# Altium PCB PC110-itx.PcbDoc (part 16 of 16)
Units mm, origin at the board's own origin, x right, y up, seen from the top; angles counter-clockwise.
Board outline 170 x 170 mm, 16 copper layers (FC1, FC2, FC3, FC4, IP1, IC1, IC2, IP2, IP3, IC3, IC4, IP4, BC4, BC3, BC2, BC1), stack 3.903 mm thick; 935 components, 1357 nets, 4698 pads, 3240 vias.
Unrouted connection lines stored in the file: 552.
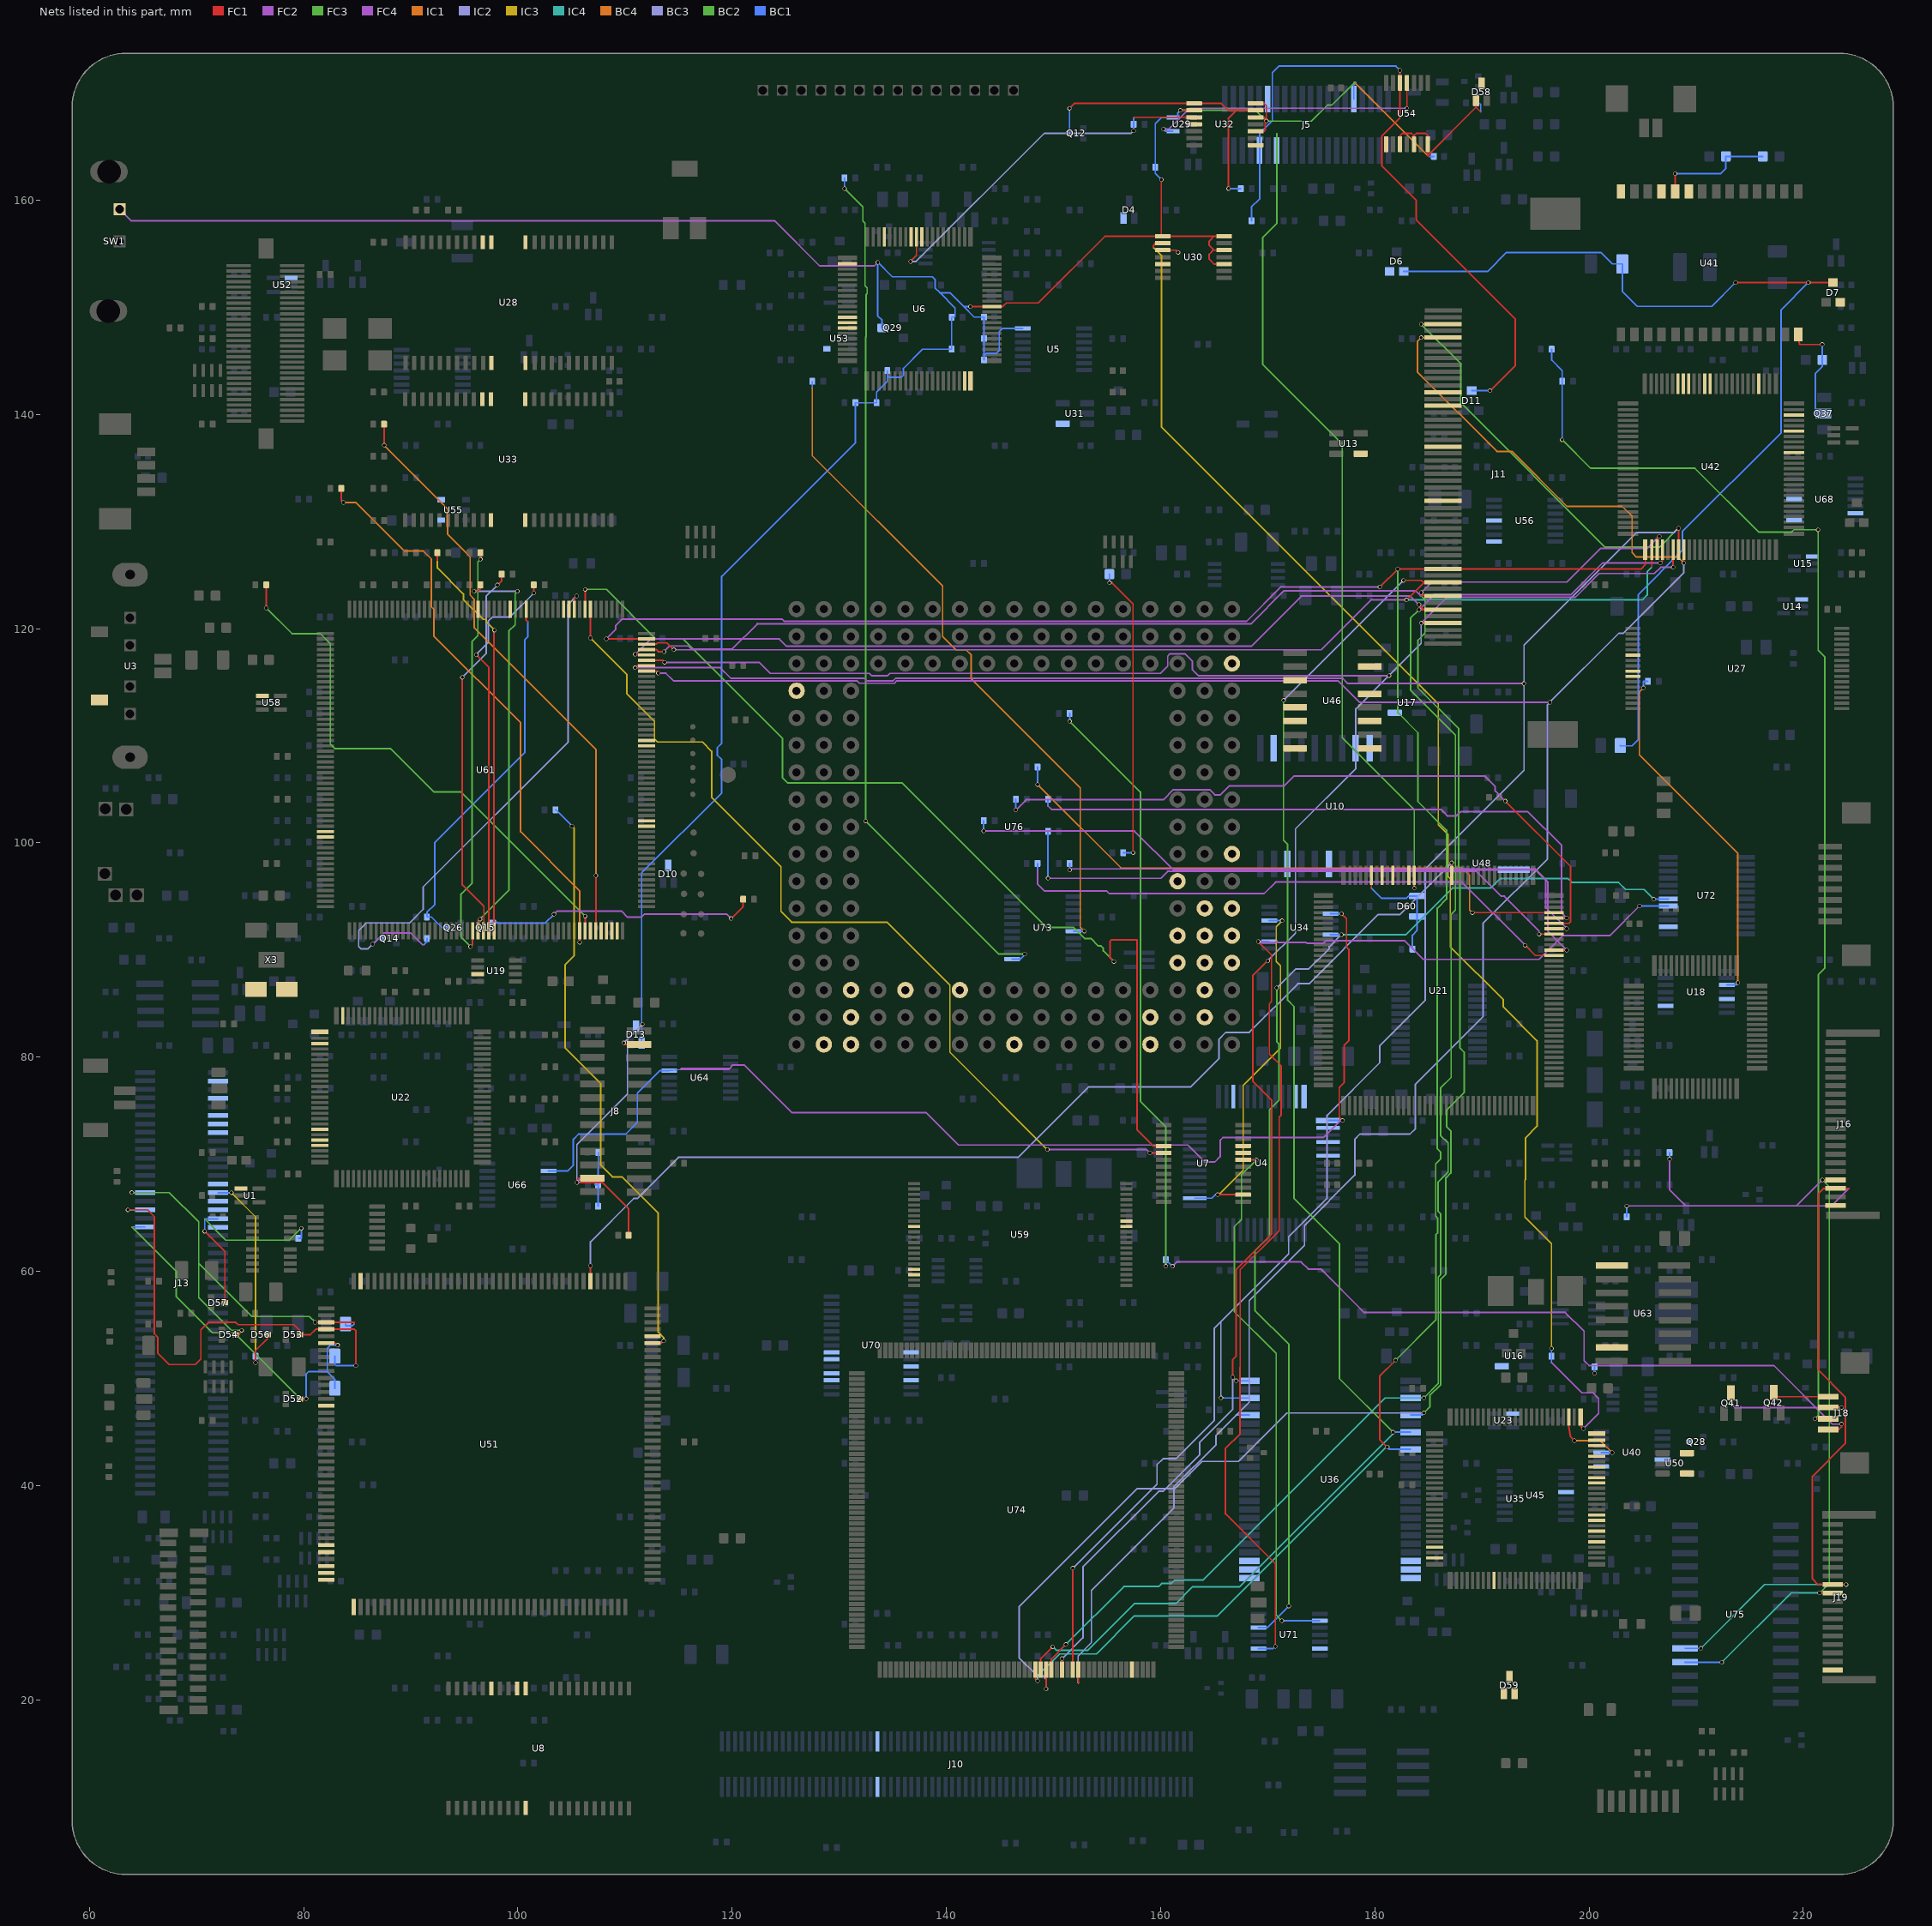
[diagram p29: the nets of this part, all layers, seen from the top]

## Via types
v1: diameter 0.4, hole 0.3, FC1 to BC1, 3240 vias

## Nets (pads, with @x,y where several pads share a name; then routed paths per layer and width w, separated by ;. In a path a pad name is that pad's centre, name@x,y a point inside that pad or via, vN(x,y) a via of type N, cw(c..) or ccw(c..) an arc to the next point about the centre after c; other vN are vias at no path point) (continued)
SD9: J11.46 U36.20 U42.8 U61.45 U74.142 | length 260.1
  FC1 w0.15: U61.45@112.028,116.057 112.899,116.057 v1(113.106,115.849) ; 152.308,21.574 U74.142@152.308,22.819 ; v1(184.328,147.172) J11.46@186.358,147.172 ; v1(208.852,126.145) U42.8@208.852,127.375
  FC2 w0.15: v1(113.106,115.849) 113.804,115.849 114.515,115.138 131.663,115.138 131.891,114.91 135.157,114.91 135.385,115.138 176.558,115.138 178.565,113.132 v1(196.342,113.132)
  BC4 w0.15: v1(184.328,147.172) 183.972,146.817 183.972,143.967 191.389,136.55 192.811,136.55 197.942,131.42 203.098,131.42 204.013,130.505 204.013,127.102 204.419,126.695 208.302,126.695 v1(208.852,126.145)
  BC3 w0.15: 152.308,21.574 152.298,21.565 152.298,24.105 153.543,25.349 153.543,30.201 161.239,37.897 161.239,39.891 165.176,43.828 165.176,44.704 168.275,47.803 168.275,57.277 173.438,62.44 173.438,64.294 178.13,68.986 178.13,72.339 178.613,72.822 183.286,72.822 183.794,73.33 183.794,77.47 190.094,83.769 190.094,92.492 196.113,98.511 196.113,112.902 v1(196.342,113.132) 202.794,119.583 203.2,119.583 208.852,125.235 v1(208.852,126.145)
  BC1 w0.15: 167.062,46.59 U36.20@168.29,46.59
SD10: J11.48 U36.22 U42.7 U61.46 U74.141 | length 267
  FC1 w0.15: v1(110.951,116.357) 111.15,116.557 U61.46@112.028,116.557 ; U74.141@151.808,22.819 v1(151.808,32.301) ; v1(184.328,148.423) J11.48@186.358,148.423 ; U42.7@208.352,127.375 v1(208.352,129.388)
  FC2 w0.15: v1(110.951,116.357) 118.897,116.357 119.884,115.37 132.357,115.37 132.587,115.14 135.036,115.14 135.266,115.37 177.004,115.37 177.495,114.879 v1(193.924,114.879)
  BC2 w0.15: v1(184.328,148.423) 188.036,144.714 188.036,141.072 201.498,127.61 206.574,127.61 v1(208.352,129.388)
  BC3 w0.15: v1(151.808,32.301) 159.665,40.158 159.665,41.961 160.223,42.519 161.442,42.519 165.005,46.082 165.005,54.667 165.633,55.296 ; v1(165.633,48.19) 165.633,55.296 ; v1(208.352,129.388) 207.946,128.981 204.445,128.981 193.924,118.46 v1(193.924,114.879) 193.924,106.776 184.709,97.561 184.709,85.319 180.471,81.081 180.471,79.506 175.539,74.574 175.539,66.827 171.958,63.246 171.958,61.62 165.633,55.296
  BC1 w0.15: v1(165.633,48.19) U36.22@168.29,48.19
SD11: J11.4 U36.24 U42.6 U61.47 U74.139 | length 217
  FC1 w0.15: U61.47@112.028,117.057 113.513,117.057 v1(113.704,116.865) ; U74.139@150.808,22.819 v1(150.808,23.851) ; v1(167.06,49.79) v1(166.726,50.124) 166.726,51.765 167.06,52.098 167.06,60.177 170.365,63.481 170.365,75.996 168.605,77.755 168.605,87.605 v1(170.002,89.002) ; v1(184.327,120.522) J11.4@186.358,120.522 ; v1(207.852,125.733) U42.6@207.852,127.375
  FC2 w0.15: v1(113.704,116.865) 122.53,116.865 123.565,115.83 132.817,115.83 133.047,115.6 134.495,115.6 134.725,115.83 159.969,115.83 160.665,116.527 160.665,117.45 160.88,117.665 162.285,117.665 162.957,116.992 162.957,116.189 163.525,115.621 v1(181.331,115.621) ; v1(184.327,120.522) 186.739,122.934 198.728,122.934 200.947,125.154 206.11,125.154 206.69,125.733 v1(207.852,125.733)
  BC3 w0.15: v1(150.808,23.851) 152.756,25.798 152.756,32.412 159.815,39.472 160.223,39.472 163.654,42.903 163.654,44.045 166.726,47.118 v1(166.726,50.124) ; v1(170.002,89.002) 172.593,91.592 172.593,101.321 178.232,106.959 178.232,112.522 v1(181.331,115.621) 184.327,118.618 v1(184.327,120.522)
  BC1 w0.15: v1(167.06,49.79) U36.24@168.29,49.79
SD12: J11.6 U36.27 U42.4 U61.48 U74.137 | length 230.7
  FC1 w0.15: v1(110.947,117.602) 110.992,117.557 U61.48@112.028,117.557 ; U74.137@149.808,22.819 149.808,23.824 v1(151.155,25.171) ; v1@184.124,121.772 v1(184.129,121.772) 184.602,121.772 ; v1(184.125,122.25) 184.602,121.772 ; J11.6@186.358,121.772 184.602,121.772 ; v1(206.64,126.136) 206.852,126.348 U42.4@206.852,127.375
  FC2 w0.15: v1@184.124,121.772 185.516,123.164 198.295,123.164 201.267,126.136 v1(206.64,126.136)
  FC3 w0.15: v1(184.129,121.772) 183.337,120.98 183.337,114.275 187.528,110.084 187.528,93.726 187.122,93.32 187.122,78.105 186.131,77.115 186.131,72.695 186.842,71.984 186.842,69.282 185.916,68.355 185.916,65.595 186.13,65.38 186.13,59.668 185.925,59.462 185.925,49.533 v1(184.582,48.19)
  IC4 w0.15: v1(151.155,25.171) 156.566,30.582 159.816,30.582 160.095,30.861 160.985,30.861 161.332,31.208 163.971,31.208 180.953,48.19 v1(184.582,48.19)
  FC4 w0.15: v1(110.947,117.602) 112.395,119.05 124.409,119.05 125.095,118.364 168.461,118.364 173.137,123.04 183.335,123.04 v1(184.125,122.25)
  BC1 w0.15: U36.27@183.34,48.19 v1(184.582,48.19)
SD13: J11.8 U36.29 U42.3 U61.49 U74.136 | length 241.2
  FC1 w0.15: U61.49@112.028,118.057 112.903,118.057 113.104,117.856 v1(113.64,117.856) ; v1(149.308,21.033) U74.136@149.308,22.819 ; v1(184.328,123.368) 184.328,123.342 184.598,123.072 ; 184.337,123.072 184.598,123.072 ; J11.8@186.358,123.072 184.598,123.072 ; U42.3@206.352,127.375 206.352,128.422 v1(206.555,128.626)
  FC2 w0.15: v1(113.64,117.856) 114.173,118.389 115.926,118.389 116.205,118.11 120.015,118.11 122.355,120.45 ; v1(184.328,123.368) 185.318,124.358 197.942,124.358 201.066,127.483 205.412,127.483 v1(206.555,128.626)
  FC3 w0.15: 184.328,123.063 184.683,122.707 184.683,119.583 184.023,118.923 184.023,114.478 187.833,110.668 187.833,97.79 187.935,97.688 187.935,80.874 188.341,80.467 188.341,76.683 186.689,75.031 186.689,73.532 187.096,73.125 187.096,69.183 186.639,68.725 186.639,59.766 186.155,59.282 186.155,49.422 185.141,48.407 185.141,47.346 v1(184.582,46.787)
  IC2 w0.15: v1(149.308,21.033) 149.308,21.946 148.902,22.352 148.363,22.352 146.787,23.927 146.787,28.703 157.792,39.708 161.297,39.708 163.855,42.266 167.261,42.266 171.783,46.787 v1(184.582,46.787)
  FC4 w0.15: 122.355,120.45 168.431,120.45 171.526,123.546 183.794,123.546 184.15,123.19 184.277,123.063 ; 184.328,123.063 184.277,123.063 ; 184.337,123.072 184.277,123.063
  BC1 w0.15: U36.29@183.34,46.59 184.385,46.59 v1(184.582,46.787)
SD14: J11.10 U36.31 U42.2 U61.50 U74.135 | length 239.4
  FC1 w0.15: U61.50@112.028,118.557 112.922,118.557 113.034,118.669 113.929,118.669 v1(114.564,118.034) ; U74.135@148.808,22.819 148.808,23.84 v1(149.936,24.968) ; v1(182.677,124.511) 184.317,124.511 184.597,124.322 ; v1(182.956,122.682) 184.597,124.322 ; J11.10@186.358,124.322 184.597,124.322 ; 205.852,125.74 U42.2@205.852,127.375
  FC3 w0.15: v1(171.475,113.309) 171.475,100.254 171.856,99.874 171.856,85.32 172.466,84.71 172.466,66.802 176.688,62.58 176.688,50.005 v1(181.704,44.99) v1@181.704,44.87
  IC4 w0.15: v1(149.936,24.968) 150.266,24.639 153.214,24.639 157.556,28.981 161.414,28.981 162.988,30.556 167.39,30.556 v1@181.704,44.87 ; v1(182.956,122.682) 204.978,122.682 205.435,123.139 205.435,125.324 205.852,125.74
  FC4 w0.15: v1(114.564,118.034) 174.981,118.034 179.629,122.682 v1(182.956,122.682)
  BC3 w0.15: v1(171.475,113.309) v1(182.677,124.511)
  BC1 w0.15: v1(181.704,44.99) U36.31@183.34,44.99
SD15: J11.12 U36.33 U42.1 U61.51 U74.134 | length 237.9
  FC1 w0.15: v1(108.255,119.057) U61.51@112.028,119.057 ; U74.134@148.308,22.819 148.308,21.974 v1(148.514,21.768) ; v1(180.472,123.901) v1(182.143,125.573) J11.12@186.358,125.573 204.841,125.573 205.252,125.984 U42.1@205.252,127.375 ; v1@181.058,43.593 v1(181.165,43.593) 180.447,44.311 180.447,50.221 v1(181.94,51.714)
  FC3 w0.15: v1(181.94,51.714) 185.695,55.469 185.695,63.419 185.877,63.602 185.877,64.959 185.686,65.15 185.686,70.053 186.131,70.499 186.131,71.145 185.826,71.45 185.826,93.904 186.69,94.767 186.69,101.194 184.023,103.861 184.023,110.287 182.143,112.166 v1(182.143,125.573)
  IC4 w0.15: v1(148.514,21.768) 148.514,22.242 150.563,24.291 154.008,24.291 157.556,27.838 165.303,27.838 v1@181.058,43.593
  FC4 w0.15: v1(108.255,119.057) 109.144,119.946 109.144,120.294 109.728,120.879 124.677,120.879 124.875,120.68 168.011,120.68 171.232,123.901 v1(180.472,123.901)
  BC1 w0.15: v1(181.165,43.593) 181.368,43.39 U36.33@183.34,43.39
Touch_X+: J18.2 R207.2 R386.1 | length 121.3
  FC1 w0.15: v1(221.082,46.253) 221.083,46.255 J18.2@222.33,46.255
  FC3 w0.15: v1(221.082,46.253) 221.412,46.584 221.412,87.732 222.021,88.341 222.021,117.348 221.386,117.983 v1(221.386,129.235)
  BC2 w0.15: v1(197.49,137.638) 200.152,134.976 209.88,134.976 215.824,129.032 218.923,129.032 219.126,129.235 v1(221.386,129.235)
  BC1 w0.15: R386.1@196.51,146.09 196.51,145.074 197.49,144.094 R207.2@197.49,143.09 v1(197.49,137.638)
Touch_X-: J18.3 Q41.2 | length 12.7
  FC1 w0.15: v1(213.25,47.65) Q41.2@213.25,48.65 ; J18.3@222.33,47.305 223.561,47.305 v1(223.571,47.295)
  FC2 w0.15: v1(213.25,47.65) 213.606,47.295 v1(223.571,47.295)
Touch_Y+: J18.1 R208.2 R388.1 | length 128.9
  FC1 w0.15: J18.1@222.33,45.255 223.317,45.255 223.571,45.509 v1(223.571,45.745)
  FC3 w0.15: v1(151.51,111.355) 158.115,104.75 158.115,75.87 160.49,73.495 v1(160.49,60.477)
  FC4 w0.15: v1(161.115,60.477) 161.522,60.884 173.126,60.884 173.787,60.223 174.955,60.223 179.019,56.159 197.79,56.159 199.536,54.413 199.536,51.67 200,51.206 217.246,51.206 222.707,45.745 v1(223.571,45.745)
  BC1 w0.15: v1(151.51,111.355) R388.1@151.51,112.09 ; v1(160.49,60.477) R208.2@160.49,61.09 160.503,61.09 v1(161.115,60.477)
Touch_Y-: J18.4 Q42.2 | length 5.3
  FC1 w0.15: Q42.2@217.24,48.7 217.635,48.305 J18.4@222.33,48.305
TRKPD_Lclick: J16.4 J19.10 R206.1 U75.4 | length 76.3
  FC1 w0.15: v1(221.528,29.985) J19.10@222.758,29.985 ; v1(221.782,68.543) J16.4@223.012,68.543
  FC2 w0.15: v1(207.51,70.485) 207.51,67.623 209.017,66.116 219.355,66.116 v1(221.782,68.543)
  FC3 w0.15: v1(221.528,29.985) 222.428,30.885 222.428,67.897 v1(221.782,68.543)
  IC4 w0.15: v1(212.384,23.51) 218.859,29.985 v1(221.528,29.985)
  BC1 w0.15: v1(207.51,70.485) R206.1@207.51,71.09 ; U75.4@208.955,23.51 v1(212.384,23.51)
TRKPD_Rclick: J16.3 J19.11 R196.1 U75.5 | length 84.6
  FC1 w0.15: v1(223.99,30.772) 223.977,30.785 J19.11@222.758,30.785 221.361,30.785 220.853,31.293 220.853,40.869 223.926,43.942 223.926,48.26 221.412,50.775 221.412,67.26 221.894,67.743 J16.3@223.012,67.743 224.255,67.743
  IC4 w0.15: v1(210.439,24.81) 216.401,30.772 v1(223.99,30.772)
  FC4 w0.15: v1(203.51,66.116) 222.631,66.116 224.257,67.742 224.255,67.743
  BC1 w0.15: R196.1@203.51,65.09 v1(203.51,66.116) ; U75.5@208.955,24.81 v1(210.439,24.81)
U8_1A3_KB_TP139: R283.2 U73.6 | length 63.4
  IC1 w0.15: 127.49,142.476 127.483,142.469 127.483,136.144 139.649,123.977 139.649,119.278 140.894,118.034 141.834,118.034 142.316,117.551 142.316,115.316 152.502,105.131 152.502,92.151 v1(152.883,91.77)
  BC1 w0.15: 127.49,142.476 R283.2@127.49,143.09 ; U73.6@151.862,91.765 152.877,91.765 v1(152.883,91.77)
U8_2A1_KB_RXD: R38.2 U73.11 | length 82.4
  FC3 w0.15: v1(130.49,161.087) 132.207,159.37 132.207,158.064 132.41,157.861 132.41,152.018 132.613,151.816 132.613,151.308 132.511,151.207 132.511,147.269 132.461,147.219 v1(132.461,102.057)
  BC2 w0.15: v1(132.461,102.057) 144.893,89.625 v1(147.32,89.625)
  BC1 w0.15: v1(130.49,161.087) R38.2@130.49,162.09 ; U73.11@146.137,89.165 146.925,89.165 147.32,89.56 v1(147.32,89.625)
U21_97: R330.1 U21.97 | length 53.8
  FC1 w0.15: v1(194.031,90.449) 194.989,89.491 U21.97@196.732,89.491
  FC2 w0.15: 148.51,97.464 148.514,97.46 148.514,96.164 149.149,95.529 154.94,95.529 155.194,95.275 169.672,95.275 170.739,96.342 188.138,96.342 v1(194.031,90.449)
  BC1 w0.15: 148.51,97.464 R330.1@148.51,98.09
U21_98: R355.2 U21.98 | length 63.9
  FC1 w0.15: U21.98@196.732,89.991 v1(197.917,89.991)
  FC4 w0.15: v1(143.49,101.117) 157.556,101.117 161.214,97.46 195.038,97.46 196.164,96.333 196.164,91.744 v1(197.917,89.991)
  BC1 w0.15: v1(143.49,101.117) R355.2@143.49,102.09
U21_101: R328.2 U21.101 | length 54.5
  FC1 w0.15: v1(195.333,91.491) U21.101@196.732,91.491
  FC2 w0.15: v1(149.49,96.698) 160.008,96.698 160.655,97.345 189.499,97.345 191.821,95.022 192.101,95.022 195.333,91.791 v1(195.333,91.491)
  BC1 w0.15: v1(149.49,96.698) R328.2@149.49,101.09
U21_102: R339.1 U21.102 | length 52.1
  FC1 w0.15: U21.102@196.732,91.991 197.909,91.991 v1(197.917,91.999)
  FC2 w0.15: v1(151.51,97.485) 151.599,97.575 194.923,97.575 195.96,96.537 195.96,93.955 v1(197.917,91.999)
  BC1 w0.15: v1(151.51,97.485) R339.1@151.51,98.09
U21_103: R336.2 U21.103 | length 65
  FC1 w0.15: v1(192.176,103.911) 198.272,97.815 198.272,92.643 198.12,92.491 U21.103@196.732,92.491
  FC2 w0.15: v1(146.482,103.073) 147.447,104.038 160.249,104.038 161.175,104.965 164.592,104.965 165.06,104.496 165.582,104.496 166.394,105.308 171.526,105.308 172.466,106.248 190.246,106.248 191.237,105.258 191.237,104.851 v1(192.176,103.911)
  BC1 w0.15: v1(146.482,103.073) 146.482,104.09 R336.2@146.49,104.09
U21_104: R351.2 U21.104 | length 58.6
  FC1 w0.15: U21.104@196.732,92.991 197.915,92.991 v1(197.917,92.989)
  FC2 w0.15: 149.49,103.491 149.479,103.48 149.828,103.13 186.156,103.13 186.755,102.532 187.622,102.532 188.006,102.916 194.29,102.916 197.434,99.771 197.434,93.472 v1(197.917,92.989)
  BC1 w0.15: 149.49,103.491 R351.2@149.49,104.09
U21_105: R331.1 U21.105 | length 56.7
  FC1 w0.15: v1(189.103,93.491) U21.105@196.732,93.491
  BC4 w0.15: v1(148.51,105.461) 156.333,97.638 188.189,97.638 188.848,96.978 188.848,93.746 v1(189.103,93.491)
  BC1 w0.15: v1(148.51,105.461) R331.1@148.51,107.09
U21_131: J5.27 U21.131 | length 79.5
  FC1 w0.15: v1(183.682,95.783) U21.131@183.682,96.966
  FC3 w0.15: 170.84,166.166 170.866,166.192 170.866,157.861 169.545,156.54 169.545,144.653 176.962,137.236 176.962,109.83 183.682,103.109 v1(183.682,95.783)
  BC1 w0.15: J5.27@170.84,164.65 170.84,166.166
U21_139: D60.1 D60.2 R349.1 U21.139 | length 11
  FC1 w0.15: 179.682,95.786 U21.139@179.682,96.966
  BC1 w0.15: 179.682,95.786 179.68,95.783 180.619,94.844 182.963,94.844 183.159,95.04 D60.1@183.938,95.04 D60.2@183.938,93.14 183.938,91.817 183.51,91.389 R349.1@183.51,90.09
U30_D0: R90.2 U30.2 U35.1 | length 132.1
  FC1 w0.15: 159.309,155.6 159.309,155.727 159.436,155.854 159.436,155.986 U30.2@160.206,155.986 ; U35.1@199.22,46.4 199.22,45.56 v1(199.466,45.314)
  FC2 w0.15: 196.49,51.49 199.314,48.666 200.355,48.666 200.889,48.133 200.889,46.736 v1(199.466,45.314)
  IC3 w0.15: 159.309,155.6 160.096,154.813 160.096,138.811 185.928,112.979 185.928,101.702 186.817,100.813 186.817,96.901 187.046,96.672 187.046,90.307 192.001,85.352 192.001,84.687 195.148,81.54 195.148,73.546 194.081,72.479 194.081,68.579 194.006,68.503 194.006,65.074 196.494,62.586 v1(196.494,52.807)
  BC1 w0.15: 196.49,51.49 R90.2@196.49,52.09 196.494,52.09 v1(196.494,52.807)
U32_R: Q12.3 R81.2 U32.1 U32.13 | length 28.9
  FC1 w0.15: v1(151.496,168.58) 151.956,169.04 U32.1@163.137,169.04 165.659,169.04 166.309,168.39 167.082,168.39 ; v1(166.345,161.09) 166.345,167.653 167.082,168.39 ; U32.13@168.863,168.39 167.082,168.39
  BC1 w0.15: Q12.3@151.496,166.243 v1(151.496,168.58) ; v1(166.345,161.09) R81.2@167.49,161.09
U53_2CLK: R82.1 U30.3 U35.3 U40.11 | length 9.5
  FC1 w0.15: U30.3@160.206,155.336 161.426,155.336 v1(161.629,155.133) ; U35.3@198.12,46.4 198.12,45.487 198.277,44.552 v1(198.632,44.197)
  BC4 w0.15: v1(198.632,44.197) 201.048,44.197 v1(202.155,43.09)
  BC1 w0.15: v1(200.51,50.49) R82.1@200.51,51.09 ; U40.11@201.138,43.09 v1(202.155,43.09)
U54_1PRE#: U29.4 U54.4 | length 26.9
  FC1 w0.15: v1(183,168.58) U54.4@183,170.953
  FC2 w0.15: v1(160.274,166.649) 160.782,166.649 162.712,168.58 v1(183,168.58)
  BC1 w0.15: v1(160.274,166.649) 160.483,166.44 U29.4@161.15,166.44
U54_Q: D11.2 J5.25 R235.2 U54.5 | length 65.4
  FC1 w0.15: v1(182.35,172.136) U54.5@182.35,170.953 182.35,167.694 180.67,166.014 180.67,163.195 183.871,159.995 183.871,158.14 193.116,148.895 193.116,144.577 v1(190.754,142.215)
  BC1 w0.15: R235.2@168.49,158.09 168.49,159.36 169.24,160.11 J5.25@169.24,164.65 169.24,166.218 170.434,167.412 170.434,171.907 171.044,172.517 181.969,172.517 v1(182.35,172.136) ; D11.2@189.05,142.215 v1(190.754,142.215)
U61_RAM_LCASL#: R272.1 U61.182 | length 35.7
  FC1 w0.15: v1(94.818,115.468) 94.818,96.088 96.825,94.082 96.825,92.554 96.778,92.507 U61.182@96.778,91.807 ; v1(98.095,124.079) 98.49,124.474 R272.1@98.49,125.09
  BC3 w0.15: v1(94.818,115.468) 97.038,117.688 97.038,123.022 v1(98.095,124.079)
U61_RAM_LCASU#: R274.1 U61.184 | length 37.6
  FC1 w0.15: 92.49,126.374 R274.1@92.49,127.09 ; U61.184@97.778,91.807 97.778,119.825 v1(97.815,119.863)
  IC3 w0.15: 92.49,126.374 92.49,125.671 94.92,123.241 94.92,122.723 96.769,120.873 96.926,120.873 97.056,120.743 97.056,120.622 v1(97.815,119.863)
U61_RAM_RAMWE#: R154.2 U61.180 | length 39.5
  FC1 w0.15: v1(95.58,90.322) 95.778,90.52 U61.180@95.778,91.807 ; v1(96.51,126.482) R154.2@96.51,127.09
  FC3 w0.15: v1(95.58,90.322) 94.691,91.211 94.691,95.225 95.733,96.266 95.733,118.835 96.266,119.369 96.266,126.238 v1(96.51,126.482)
U61_RAM_RAS0: R101.2 U61.203 | length 55.5
  FC1 w0.15: v1(87.51,137.128) R101.2@87.51,139.09 ; U61.203@107.278,91.807 v1(107.278,96.966)
  IC1 w0.15: v1(87.51,137.128) 93.428,131.21 93.428,128.848 95.545,126.73 95.545,123.135 95.922,122.759 95.922,120.098 107.278,108.742 v1(107.278,96.966)
U61_RAM_RAS2: R103.2 U61.201 | length 50.7
  FC1 w0.15: v1(76.51,121.94) R103.2@76.51,124.09 ; U61.201@106.278,91.807 v1(106.278,93.169)
  BC2 w0.15: v1(76.51,121.94) 78.918,119.532 81.559,119.532 82.499,118.593 82.499,109.22 82.906,108.814 88.113,108.814 92.151,104.775 94.672,104.775 v1(106.278,93.169)
U61_RAM_RAS3: R106.2 U61.200 | length 54.4
  FC1 w0.15: R106.2@83.51,133.09 83.51,131.984 v1(83.718,131.775) ; v1(105.766,90.729) 105.778,90.741 U61.200@105.778,91.807
  IC1 w0.15: v1(83.718,131.775) 84.887,131.775 89.408,127.254 91.186,127.254 91.923,126.517 91.923,122.047 92.151,121.818 92.151,119.329 100.254,111.227 100.254,101.041 105.766,95.529 v1(105.766,90.729)
U61_RAM_UCASL#: R159.2 U61.181 | length 38.3
  FC1 w0.15: v1(95.91,123.495) 96.256,123.495 96.51,123.749 R159.2@96.51,124.09 ; U61.181@96.278,91.807 96.278,92.697 v1(96.469,92.888)
  FC3 w0.15: v1(96.469,92.888) 99.162,95.58 99.162,119.79 99.743,120.371 99.743,123.288 v1(99.949,123.495)
  IC2 w0.15: v1(95.91,123.495) v1(99.949,123.495)
U61_RAM_UCASU#: R261.1 U61.183 | length 35.9
  FC1 w0.15: v1(96.114,117.577) 97.278,116.412 U61.183@97.278,91.807 ; v1(101.49,123.334) R261.1@101.49,124.09
  IC2 w0.15: v1(96.114,117.577) 97.241,118.704 97.241,120.701 97.648,121.107 99.263,121.107 v1(101.49,123.334)
U61_RTCBAT_470K: Q26.3 R248.1 U61.71 | length 34.9
  FC1 w0.15: U61.71@100.778,121.807 100.778,120.812 100.939,120.651
  BC1 w0.15: Q26.3@93.35,92.09 92.923,92.09 91.923,93.09 R248.1@91.51,93.09 91.51,93.523 92.253,94.266 92.253,100.051 100.66,108.458 100.66,118.976 100.939,119.255 100.939,120.651
U71_OR1_IN2: U7.19 U71.2 | length 50.5
  FC1 w0.15: U7.19@167.712,70.415 168.929,70.415 v1(168.935,70.409)
  FC3 w0.15: v1(168.935,70.409) 167.548,69.021 167.548,64.842 166.892,64.186 166.892,56.247 170.79,52.349 170.79,27.915 v1(171.314,27.39)
  BC1 w0.15: v1(171.314,27.39) U71.2@174.862,27.39
U106_1CLK: R80.2 U6.11 U32.3 | length 35.3
  FC1 w0.15: v1(136.652,154.28) 137.21,154.838 U6.11@137.21,156.575 ; 157.49,167.73 157.48,167.74 U32.3@163.137,167.74
  BC3 w0.15: v1(136.652,154.28) 137.185,154.28 149.149,166.243 157.243,166.243 v1(157.49,166.49)
  BC1 w0.15: v1(157.49,166.49) R80.2@157.49,167.09 157.49,167.73
unconnected-(C51-+-Pad1): C51.1 D6.3 D7.2 R68.1 | length 96.5
  FC1 w0.15: v1(213.681,152.315) v1(220.472,152.315) D7.2@222.778,152.315
  BC1 w0.15: D6.3@182.7,153.365 190.551,153.365 192.304,155.118 201.092,155.118 202.16,154.05 C51.1@203.11,154.05 203.11,151.486 204.507,150.089 211.455,150.089 v1(213.681,152.315) ; R68.1@202.913,109.09 202.913,109.068 204.013,109.068 204.597,109.652 204.597,123.19 208.712,127.305 208.712,129.083 217.932,138.303 217.932,149.775 v1(220.472,152.315)
unconnected-(C131-Pad1): C131.1 Q37.2 U41.28 | length 10.5
  FC1 w0.15: U41.28@219.525,147.475 219.659,146.533 v1(221.775,146.533)
  BC1 w0.15: v1(221.775,146.533) C131.1@221.775,145.09 221.775,144.475 221.132,143.833 221.132,140.09 Q37.2@221.862,140.09
unconnected-(C132-Pad1): C132.1 C134.2 U41.10 | length 11.2
  FC1 w0.15: U41.10@208.025,160.825 v1(208.025,162.484)
  BC1 w0.15: v1(208.025,162.484) 212.292,162.484 212.775,162.966 C132.1@212.775,164.09 C134.2@216.225,164.09
unconnected-(D4-Pad1): D4.1
unconnected-(D6-NC-Pad1): D6.1
unconnected-(D7-NC-Pad1): D7.1
unconnected-(D10-common-Pad3): D10.3
unconnected-(D13-common-Pad3): D13.3
unconnected-(D58-common-Pad3): D58.3
unconnected-(D59-A-Pad1): D59.1
unconnected-(D59-A-Pad3): D59.3
unconnected-(D59-K-Pad2): D59.2
unconnected-(J5-Pin_6-Pad6): J5.6
unconnected-(J10-NC-Pad47): J10.47
unconnected-(J10-NC-Pad117): J10.117
unconnected-(J11-DMACK#-Pad38): J11.38
unconnected-(J11-DMREQ-Pad36): J11.36
unconnected-(J11-VS2-Pad30): J11.30
unconnected-(J11-WE#-Pad22): J11.22
unconnected-(J13-NC-Pad32): J13.32
unconnected-(J13-NC-Pad34): J13.34
unconnected-(J13-NC-Pad35): J13.35
unconnected-(J13-NC-Pad37): J13.37
unconnected-(J13-NC-Pad43): J13.43
unconnected-(J13-NC-Pad44): J13.44
unconnected-(J13-NC-Pad45): J13.45
unconnected-(J13-NC-Pad47): J13.47
unconnected-(J13-NC-Pad49): J13.49
unconnected-(J16-Pin_1-Pad1): J16.1
unconnected-(J19-Pin_1-Pad1): J19.1
unconnected-(Q28-C-Pad3): Q28.3
unconnected-(U1-NC-Pad1): U1.1
unconnected-(U3-IRDA_LED_K-Pad4): U3.4
unconnected-(U4-GamePad-Pad13): U4.13
unconnected-(U4-NC-Pad3): U4.3
unconnected-(U4-NC-Pad12): U4.12
unconnected-(U4-NC-Pad15): U4.15
unconnected-(U4-NC-Pad17): U4.17
unconnected-(U4-NC-Pad19): U4.19
unconnected-(U6-P24-Pad34): U6.34
unconnected-(U6-P25-Pad33): U6.33
unconnected-(U6-P26-Pad32): U6.32
unconnected-(U6-P42-Pad22): U6.22
unconnected-(U6-P47-Pad17): U6.17
unconnected-(U6-P54-Pad12): U6.12
unconnected-(U6-P56-Pad10): U6.10
unconnected-(U6-SEG10-Pad60): U6.60
unconnected-(U6-SEG11-Pad59): U6.59
unconnected-(U7-B1-Pad21): U7.21
unconnected-(U7-B2-Pad20): U7.20
unconnected-(U8-NC-Pad11): U8.11
unconnected-(U8-NC-Pad12): U8.12
unconnected-(U8-NC-Pad15): U8.15
unconnected-(U8-NC-Pad30): U8.30
unconnected-(U10-IRQ#-Pad2): U10.2
unconnected-(U10-NC-Pad8): U10.8
unconnected-(U10-NC-Pad9): U10.9
unconnected-(U10-NC-Pad19): U10.19
unconnected-(U10-NC-Pad22): U10.22
unconnected-(U13-NC-Pad4): U13.4
unconnected-(U14-NC-Pad1): U14.1
unconnected-(U15-NC-Pad1): U15.1
unconnected-(U16-NC-Pad4): U16.4
unconnected-(U17-NC-Pad4): U17.4
unconnected-(U18A-Q-Pad5): U18.5
unconnected-(U18B-Q-Pad9): U18.9
unconnected-(U19-Pad3): U19.3
unconnected-(U21-NC-Pad132): U21.132
unconnected-(U21-NC-Pad135): U21.135
unconnected-(U21-NC-Pad137): U21.137
unconnected-(U22-DENSELCT-Pad99): U22.99
unconnected-(U22-DS1#-Pad1): U22.1
unconnected-(U22-IDEENHI#-Pad22): U22.22
unconnected-(U22-IDEENLO#-Pad21): U22.21
unconnected-(U22-MTR1#-Pad3): U22.3
unconnected-(U22-X2{slash}CLK2-Pad19): U22.19
unconnected-(U23-NC-Pad1): U23.1
unconnected-(U27-NC-Pad6): U27.6
unconnected-(U27-NC-Pad9): U27.9
unconnected-(U27-NC-Pad10): U27.10
unconnected-(U28-NC-Pad11): U28.11
unconnected-(U28-NC-Pad12): U28.12
unconnected-(U28-NC-Pad13): U28.13
unconnected-(U28-NC-Pad33): U28.33
unconnected-(U28-NC-Pad34): U28.34
unconnected-(U30A-Q-Pad5): U30.5
unconnected-(U31-NC-Pad4): U31.4
unconnected-(U32A-{\S\}\-\P\a\d\4\)\: U32.4
unconnected-(U32B-{\Q\}\-\P\a\d\8\)\: U32.8
unconnected-(U33-NC-Pad11): U33.11
unconnected-(U33-NC-Pad12): U33.12
unconnected-(U33-NC-Pad13): U33.13
unconnected-(U33-NC-Pad33): U33.33
unconnected-(U33-NC-Pad34): U33.34
unconnected-(U35-NC-Pad47): U35.47
unconnected-(U35-NC-Pad49): U35.49
unconnected-(U35-NC-Pad59): U35.59
unconnected-(U35-NC-Pad80): U35.80
unconnected-(U35-NC-Pad82): U35.82
unconnected-(U35-NC-Pad84): U35.84
unconnected-(U35-NC-Pad85): U35.85
unconnected-(U35-NC-Pad91): U35.91
unconnected-(U35-NC-Pad92): U35.92
unconnected-(U35-NC-Pad94): U35.94
unconnected-(U35-NC-Pad96): U35.96
unconnected-(U35-NC-Pad98): U35.98
unconnected-(U35-NC-Pad99): U35.99
unconnected-(U35-NC-Pad100): U35.100
unconnected-(U36-NC-Pad1): U36.1
unconnected-(U36-NC-Pad2): U36.2
unconnected-(U36-NC-Pad3): U36.3
unconnected-(U36-NC-Pad46): U36.46
unconnected-(U36-NC-Pad47): U36.47
unconnected-(U36-NC-Pad48): U36.48
unconnected-(U40A-Q-Pad5): U40.5
unconnected-(U40B-Q-Pad9): U40.9
unconnected-(U41-NC-Pad9): U41.9
unconnected-(U41-NC-Pad11): U41.11
unconnected-(U41-NC-Pad14): U41.14
unconnected-(U42-INPACK-Pad48): U42.48
unconnected-(U42-IO1-Pad67): U42.67
unconnected-(U42-IO2-Pad68): U42.68
unconnected-(U42-REG-Pad45): U42.45
unconnected-(U42-SCLK0-Pad54): U42.54
unconnected-(U42-SO2-Pad69): U42.69
unconnected-(U42-SO3-Pad63): U42.63
unconnected-(U42-TEST-Pad64): U42.64
unconnected-(U42-WE-Pad41): U42.41
unconnected-(U45A-{\Q\}\-\P\a\d\4\)\: U45.4
unconnected-(U46-NC-Pad3): U46.3
unconnected-(U46-NC-Pad5): U46.5
unconnected-(U46-NC-Pad6): U46.6
unconnected-(U46-NC-Pad8): U46.8
unconnected-(U46-NC-Pad9): U46.9
unconnected-(U46-NC-Pad11): U46.11
unconnected-(U46-NC-Pad13): U46.13
unconnected-(U46-NC-Pad15): U46.15
unconnected-(U48-D-Pad3): U48.3
unconnected-(U50-NC-Pad4): U50.4
unconnected-(U50-NC-Pad5): U50.5
unconnected-(U51-ACTI-Pad75): U51.75
unconnected-(U51-CASBH#-Pad80): U51.80
unconnected-(U51-CASBL#-Pad81): U51.81
unconnected-(U51-ENABKL-Pad76): U51.76
unconnected-(U51-M-Pad55): U51.55
unconnected-(U51-OEH#-Pad39): U51.39
unconnected-(U51-RASB#-Pad78): U51.78
unconnected-(U51-WEB#-Pad79): U51.79
unconnected-(U51-XTAL0-Pad156): U51.156
unconnected-(U52-NC-Pad1): U52.1
unconnected-(U53-NC-Pad4): U53.4
unconnected-(U54B-{\Q\}\-\P\a\d\8\)\: U54.8
unconnected-(U55-NC-Pad4): U55.4
unconnected-(U55-NC-Pad5): U55.5
unconnected-(U56-Pad8): U56.8
unconnected-(U56-Pad11): U56.11
unconnected-(U58-NC-Pad1): U58.1
unconnected-(U59-DU-Pad12): U59.12
unconnected-(U59-NC-Pad13): U59.13
unconnected-(U59-NC-Pad29): U59.29
unconnected-(U59-NC-Pad37): U59.37
unconnected-(U59-NC-Pad38): U59.38
unconnected-(U61-Pad16): U61.16
unconnected-(U61-Pad17): U61.17
unconnected-(U61-Pad31): U61.31
unconnected-(U61-Pad32): U61.32
unconnected-(U61-Pad63): U61.63
unconnected-(U61-Pad64): U61.64
unconnected-(U61-Pad74): U61.74
unconnected-(U61-Pad80): U61.80
unconnected-(U61-Pad142): U61.142
unconnected-(U61-Pad143): U61.143
unconnected-(U61-Pad204): U61.204
unconnected-(U61-Pad205): U61.205
unconnected-(U61-Pad206): U61.206
unconnected-(U61-Pad207): U61.207
unconnected-(U61-RAS1-Pad202): U61.202
unconnected-(U63-1.84MHz-Pad1): U63.1
unconnected-(U63-12MHz-Pad7): U63.7
unconnected-(U68-Pad6): U68.6
unconnected-(U68-Pad8): U68.8
unconnected-(U68-Pad11): U68.11
unconnected-(U70-APWR_GOOD#-Pad13): U70.13
unconnected-(U70-AVCC-Pad9): U70.9
unconnected-(U70-AVCC-Pad11): U70.11
unconnected-(U70-BPWR_GOOD#-Pad19): U70.19
unconnected-(U70-BVCC-Pad21): U70.21
unconnected-(U70-BVCC-Pad22): U70.22
unconnected-(U70-OC#-Pad18): U70.18
unconnected-(U71-Pad6): U71.6
unconnected-(U72-B8-Pad14): U72.14
unconnected-(U74-IRQ12-Pad152): U74.152
unconnected-(U76-BOFF#-PadD17): U76.D17
unconnected-(U76-BREQ-PadQ15): U76.Q15
unconnected-(U76-BS8#-PadD16): U76.D16
unconnected-(U76-INC-PadA10): U76.A10
unconnected-(U76-INC-PadA12): U76.A12
unconnected-(U76-INC-PadA13): U76.A13
unconnected-(U76-INC-PadB12): U76.B12
unconnected-(U76-INC-PadB13): U76.B13
unconnected-(U76-INC-PadB15): U76.B15
unconnected-(U76-INC-PadC14): U76.C14
unconnected-(U76-INC-PadR17): U76.R17
unconnected-(U76-LOCK#-PadN15): U76.N15
unconnected-(U76-NC-PadA3): U76.A3
unconnected-(U76-NC-PadA14): U76.A14
unconnected-(U76-NC-PadB14): U76.B14
unconnected-(U76-NC-PadB16): U76.B16
unconnected-(U76-NC-PadC13): U76.C13
unconnected-(U76-NC-PadS4): U76.S4
unconnected-(U76-PCD-PadJ17): U76.J17
unconnected-(U76-PCHK#-PadQ17): U76.Q17
unconnected-(U76-PLOCK#-PadQ16): U76.Q16
unconnected-(U76-PWT-PadL15): U76.L15
unconnected-(U76-RESERVED#-PadC11): U76.C11
unconnected-(X3-Pad2): X3.2
unconnected-(X3-Pad3): X3.3
UNKNOWN1: U7.4 U61.60 | length 93.4
  FC1 w0.15: U61.60@106.278,121.807 v1(106.278,123.672) ; v1(155.651,88.925) 155.278,89.298 155.278,90.83 155.405,90.957 157.785,90.957 157.81,90.932 157.81,73.214 159.309,71.715 U7.4@160.288,71.715
  BC2 w0.15: v1(106.278,123.672) 108.255,123.672 112.852,119.075 115.392,119.075 124.714,109.753 124.714,106.07 125.171,105.613 135.852,105.613 149.34,92.126 151.867,92.126 152.917,91.075 153.502,91.075 154.188,90.388 154.432,90.388 154.65,90.17 154.65,89.926 v1(155.651,88.925)
UNKNOWN2: U7.5 U61.59 | length 86.7
  FC1 w0.15: v1(106.778,119.126) U61.59@106.778,121.807 ; v1(159.004,71.065) U7.5@160.288,71.065
  FC2 w0.15: v1(149.428,71.374) 158.695,71.374 v1(159.004,71.065)
  IC3 w0.15: v1(106.778,119.126) 110.187,115.717 110.187,113.918 112.751,111.354 112.751,109.703 113.029,109.425 117.22,109.425 118.085,108.56 118.085,104.267 124.562,97.789 124.562,93.598 125.552,92.608 134.442,92.608 140.335,86.716 140.335,80.467 v1(149.428,71.374)
VCC: C29.1 C61.1 C67.2 C88.2 C96.2 C217.1 C220.2 C231.2 D13.2 D58.2 J5.16 J8.2 J8.25 Q29.3 R44.1 R52.2 R128.1 R278.2 R285.2 R288.1 R356.2 SW1.1 U5.14 U6.71 U29.5 U30.1 U30.10 U30.12 U30.14 U32.2 U32.10 U32.12 U32.14 U54.10 U54.12 U54.14 | length 324.9
  FC1 w0.15: J8.2@106.95,68.7 105.708,68.7 105.512,68.504 v1(105.512,68.301) 107.871,68.301 110.335,65.837 C88.2@110.335,63.373 ; v1(109.88,81.331) 110.011,81.2 J8.25@111.3,81.2 ; v1(142.254,150.075) U6.71@144.26,150.075 145.274,150.075 145.61,150.411 148.582,150.411 154.807,156.636 U30.1@160.071,156.636 ; v1(160.071,161.923) U30.1@160.071,156.636 ; v1(161.849,168.39) U32.2@163.137,168.39 ; U30.10@165.93,154.036 164.998,154.036 164.541,154.493 164.541,154.955 164.922,155.336 164.998,155.336 ; U30.12@165.93,155.336 164.998,155.336 ; U30.14@165.93,156.636 164.998,156.636 ; U32.10@168.863,166.44 169.672,166.44 169.774,166.542 169.774,167.638 ; U32.12@168.863,167.74 169.672,167.74 169.774,167.638 ; U32.14@168.863,169.04 169.672,169.04 169.875,168.837 v1(169.875,167.386) 169.774,167.638 ; U54.10@182.35,165.228 182.35,166.014 182.579,166.243 183.421,166.243 183.65,166.014 ; U54.12@183.65,165.228 183.65,166.014 ; 184.931,164.166 184.95,164.186 ; 185.046,164.09 184.95,164.186 ; D58.2@189.45,169.34 189.45,168.686 ; 189.89,168.245 189.45,168.686 ; U30.1@160.071,156.636 U30.1@160.206,156.636 164.998,156.636 ; 164.998,155.336 164.541,155.793 164.541,156.179 164.998,156.636 ; 183.65,166.014 183.879,166.243 184.721,166.243 184.95,166.014 U54.14@184.95,165.228 184.95,164.186 ; 184.95,164.186 189.45,168.686
  FC3 w0.15: v1(161.849,168.39) 168.871,168.39 v1(169.875,167.386) ; 169.774,167.638 v1(169.875,167.386) ; 178.105,170.993 175.997,168.885 175.59,168.885 174.092,167.386 v1(169.875,167.386)
  IC1 w0.15: 178.105,170.993 184.931,164.166
  FC4 w0.15: SW1.1@62.828,159.162 63.9,158.09 123.953,158.09 128.169,153.874 133.274,153.874 v1(133.604,154.203)
  BC3 w0.15: v1(105.512,68.301) 105.512,71.831 110.236,76.556 110.236,81.686 ; v1(109.88,81.331) 110.236,81.686 ; v1(111.633,83.083) 110.236,81.686
  BC1 w0.15: v1(105.512,68.301) 105.918,68.707 106.756,68.707 107.188,68.275 107.188,68.09 C217.1@107.48,68.09 ; C61.1@107.48,66.09 C217.1@107.48,68.09 ; R128.1@107.51,71.09 107.51,69.601 107.48,69.571 C217.1@107.48,68.09 ; D13.2@111.55,81.34 v1@111.55,83.166 ; v1(111.633,83.083) v1@111.55,83.166 ; Q29.3@134,148.09 134,148.793 133.604,149.189 v1(133.604,154.203) 134.95,152.857 138.684,152.857 138.938,152.603 138.938,151.816 139.395,151.359 ; R285.2@134.49,144.09 134.49,143.662 ; v1(142.254,150.075) 141.611,150.075 ; C67.2@143.52,145.09 143.52,145.491 ; U5.14@147.137,148.04 145.795,148.04 145.772,148.017 145.223,148.017 144.932,147.726 144.932,145.974 144.678,145.72 143.749,145.72 143.52,145.491 ; v1(160.071,161.923) 159.51,162.484 R44.1@159.51,163.09 159.51,167.159 160.091,167.74 U29.5@161.15,167.74 161.15,167.716 161.62,167.716 161.62,168.161 v1(161.849,168.39) ; J5.16@178.04,169.45 178.04,170.801 178.232,170.993 178.105,170.993 ; 185.046,164.09 C96.2@185.52,164.09 ; C29.1@189.48,169.09 189.89,168.988 189.89,168.245 ; v1@111.55,83.166 111.55,97.199 119.024,104.673 119.024,107.773 118.619,108.179 118.619,108.889 119.024,109.295 119.024,124.892 131.51,137.377 R288.1@131.51,141.09 R278.2@133.49,141.09 133.49,142.088 134.49,143.088 134.49,143.662 ; 134.49,143.662 134.693,143.459 135.788,143.459 135.992,143.662 135.992,144.296 137.786,146.09 R356.2@140.49,146.09 R52.2@140.49,149.09 140.733,149.09 140.818,149.174 140.818,149.936 139.395,151.359 ; 139.395,151.359 140.327,151.359 141.611,150.075 ; 141.611,150.075 142.596,149.09 C231.2@143.52,149.09 C220.2@143.52,147.09 143.52,145.491
VGA_ADDHI: U21.124 U51.6 | length 101
  FC1 w0.15: U51.6@106.775,59.1 v1(106.775,60.528) ; v1(187.173,98.146) 187.182,98.136 U21.124@187.182,96.966
  IC2 w0.15: v1(106.775,60.528) 106.775,62.765 110.813,66.803 111.145,66.803 114.99,70.648 146.696,70.648 153.264,77.216 162.789,77.216 165.456,79.883 165.456,81.686 166.091,82.321 168.28,82.321 172.827,86.868 173.863,86.868 180.324,93.329 182.356,93.329 v1(187.173,98.146)
VGA_Blue: D54.3 J13.65 R264.1 U51.43 | length 39.8
  FC1 w0.15: D54.3@73.65,54.09 73.965,54.09 v1(74.219,54.508) ; v1(81.077,55.255) U51.43@82.13,55.255 84.734,55.255 84.734,55.118
  BC2 w0.15: v1(63.957,67.361) 67.462,67.361 70.206,64.618 70.206,60.757 ; v1(74.219,54.508) 73.254,54.508 70.206,57.556 70.206,60.757 ; v1(81.077,55.255) 80.544,55.788 75.175,55.788 70.206,60.757
  BC1 w0.15: v1(63.957,67.361) 63.965,67.353 J13.65@65.207,67.353 ; R264.1@83.913,55.09 83.913,54.915 84.531,54.915 84.734,55.118
VGA_CLK: R350.1 U51.155 | length 56.1
  FC1 w0.15: U51.155@112.57,53.305 113.401,53.305 v1(113.614,53.518)
  IC3 w0.15: v1(105.054,101.566) 105.257,101.363 105.257,89.484 104.419,88.646 104.419,80.863 107.747,77.536 107.747,69.901 108.815,68.833 109.725,68.833 113.106,65.452 113.106,54.331 113.614,53.823 v1(113.614,53.518)
  BC1 w0.15: R350.1@103.51,103.09 103.53,103.09 v1(105.054,101.566)
VGA_Green: D53.3 J13.67 R273.1 U51.44 | length 46.4
  FC1 w0.15: v1(63.602,65.753) 65.43,65.753 66.065,65.118 66.065,54.178 66.37,53.873 66.37,52.4 67.462,51.308 69.901,51.308 70.409,51.816 70.409,54.534 71.12,55.245 73.658,55.245 73.874,55.03 79.078,55.03 79.65,54.458 D53.3@79.65,54.09 80.62,54.09 81.135,54.605 U51.44@82.13,54.605 84.739,54.605 84.886,54.458 v1(84.886,51.206)
  BC1 w0.15: v1(63.602,65.753) J13.67@65.207,65.753 ; R273.1@82.913,52.09 82.913,51.308 83.014,51.206 v1(84.886,51.206)
VGA_HSync: D56.3 J13.36 R53.1 | length 21.7
  FC1 w0.15: v1(75.51,51.49) 75.51,52.625 76.65,53.765 D56.3@76.65,54.09
  IC3 w0.15: v1(73.254,67.353) 75.51,65.096 v1(75.51,51.49)
  BC1 w0.15: J13.36@72.008,67.353 v1(73.254,67.353) ; v1(75.51,51.49) R53.1@75.51,52.09
VGA_Red: D52.3 J13.69 R267.1 U51.46 | length 36.8
  FC1 w0.15: D52.3@79.65,48.09 v1@80.221,48.09 ; U51.46@82.13,53.305 82.991,53.305 v1(83.185,53.111)
  BC2 w0.15: 63.973,64.152 68.097,60.028 68.097,57.658 71.484,54.271 73.516,54.271 79.68,48.108 v1(80.239,48.108)
  BC1 w0.15: 63.973,64.152 J13.69@65.207,64.152 ; v1@80.221,48.09 v1(80.239,48.108) 80.239,50.419 80.467,50.648 82.22,50.648 ; R267.1@82.913,49.09 82.913,49.929 82.22,50.622 82.22,50.648 ; v1(83.185,53.111) 82.499,53.111 82.22,52.832 82.22,50.648
VGA_VSync: D57.3 J13.33 R46.1 | length 22.6
  FC1 w0.15: v1(70.764,63.754) 72.65,61.868 D57.3@72.65,57.09
  BC2 w0.15: 70.772,64.897 70.764,64.897 72.746,62.916 78.664,62.916 v1(79.781,64.033)
  BC1 w0.15: v1(70.764,63.754) 70.764,64.889 70.772,64.897 ; R46.1@79.51,63.09 79.781,63.09 v1(79.781,64.033) ; 70.772,64.897 70.778,64.902 J13.33@72.008,64.902 70.772,64.897
YellowWire1_2: Q15.1 R181.1 | length 25.5
  FC1 w0.15: v1(119.913,92.939) 121.029,94.054 R181.1@121.029,94.742
  FC2 w0.15: v1(103.376,93.345) 103.68,93.649 109.657,93.649 110.24,93.066 111.533,93.066 111.812,93.345 119.507,93.345 v1(119.913,92.939)
  BC1 w0.15: Q15.1@97.65,92.59 98.063,92.59 98.131,92.522 102.554,92.522 v1(103.376,93.345)
YMF_CLK: R353.2 U18.3 | length 33.6
  IC1 w0.15: v1(205.08,114.478) 204.699,114.097 204.699,108.229 213.893,99.035 v1(213.893,86.944)
  BC1 w0.15: v1(205.08,114.478) 205.08,115.09 R353.2@205.49,115.09 ; U18.3@212.863,86.74 213.689,86.74 v1(213.893,86.944)
YMF_CS#_Buf: U4.14 U34.2 U64.12 U66.2 | length 114.6
  FC1 w0.15: v1(176.886,93.39) 177.354,92.922 177.354,90.288 177.572,90.069 177.572,81.535 177.127,81.09 177.127,77.609 176.682,77.164 176.682,74.397 v1(176.987,74.092)
  FC2 w0.15: v1(176.987,74.092) 176.784,74.092 175.184,72.492 165.811,72.492 165.558,72.239 165.558,70.714 165.05,70.206 164.135,70.206 162.535,71.806 141.122,71.806 138.1,74.828 125.578,74.828 121.133,79.273 120.091,79.273 119.761,78.943 ; 119.761,78.943 119.659,78.842 115.155,78.842 115.257,78.943 119.761,78.943
  BC1 w0.15: U66.2@102.862,69.39 104.671,69.39 105.181,69.901 105.181,72.339 105.664,72.822 110.058,72.822 111.15,73.914 111.15,76.657 113.233,78.74 U64.12@114.137,78.74 115.155,78.842 ; U4.14@175.6,74.09 176.782,74.09 176.784,74.092 v1(176.987,74.092) ; U34.2@175.862,93.39 v1(176.886,93.39)
YMF_RD#_Buf: U34.5 U71.12 U72.18 | length 106.4
  FC3 w0.15: v1(170.84,86.462) 170.84,81.457 171.043,81.255 171.043,75.971 170.161,75.089 170.161,63.253 168.808,61.9 168.808,56.363 171.983,53.188 v1(171.983,28.772)
  IC2 w0.15: v1(170.84,86.462) 172.618,88.24 173.838,88.24 175.743,90.145 175.743,90.303 v1(176.88,91.44)
  IC4 w0.15: v1(176.88,91.44) 182.905,91.44 187.249,95.783 190.805,95.783 191.694,96.672 198.044,96.672 198.399,96.317 202.747,96.317 203.404,95.66 205.127,95.66 v1(206.045,94.742)
  BC1 w0.15: U71.12@169.137,26.74 169.951,26.74 v1(171.983,28.772) ; U34.5@175.862,91.44 v1(176.88,91.44) ; v1(206.045,94.742) 206.068,94.765 U72.18@207.4,94.765
YMF_SA0_A0: U4.41 U7.14 U34.12 | length 34.3
  FC1 w0.15: v1(165.323,67.165) U7.14@167.712,67.165
  IC3 w0.15: v1(165.323,67.165) 165.438,67.165 167.716,69.444 167.716,77.368 171.196,80.848 171.196,88.519 170.79,88.925 170.79,92.177 v1(171.348,92.735)
  BC1 w0.15: U4.41@163.2,66.84 164.795,66.84 165.12,67.165 v1(165.323,67.165) ; U34.12@170.137,92.74 171.344,92.74 v1(171.348,92.735)
YMF_VSS_Res: Q14.3 R119.1 U61.62 | length 54
  FC1 w0.15: U61.62@105.278,121.807 105.278,122.855 v1(105.486,123.063)
  IC2 w0.15: v1@86.462,90.551 v1(86.436,90.551) 86.004,90.119 85.344,90.119 85.141,90.322 85.141,91.821 85.852,92.532 89.891,92.532 91.161,93.802 91.161,95.885 104.699,109.423 104.699,122.276 v1(105.486,123.063)
  FC4 w0.15: v1(86.436,90.551) 87.478,91.592 90.001,91.592 91.104,90.49 91.237,90.49
  BC1 w0.15: v1@86.462,90.551 87.001,91.09 Q14.3@87.35,91.09 ; 91.237,90.49 91.51,90.763 R119.1@91.51,91.09
YMF_WR#_Buf: U34.9 U71.9 U72.17 | length 114.8
  FC1 w0.15: v1(169.12,90.79) 170.358,89.552 170.358,85.192 170.155,84.988 170.155,80.289 171.258,79.186 171.258,74.6 171.069,74.411 171.069,63.805 167.436,60.172 167.436,51.055 167.415,51.033 167.415,44.835 166.065,43.485 166.065,37.363 170.713,32.715 v1(170.713,24.994)
  FC2 w0.15: v1(169.12,90.79) 169.207,90.703 173.585,90.703 173.66,90.628 175.184,90.628 175.438,90.881 182.753,90.881 184.506,89.129 195.326,89.129 197.561,91.364 201.955,91.364 v1(204.707,94.115)
  BC1 w0.15: v1(169.12,90.79) U34.9@170.137,90.79 ; U71.9@169.137,24.79 170.51,24.79 v1(170.713,24.994) ; v1(204.707,94.115) U72.17@207.4,94.115
YMFDAC_OUTPUT: C11.2 R26.1 | length 28
  FC1 w0.15: v1(155.225,124.282) 155.473,124.282 157.429,122.326 v1(157.429,99.09)
  BC1 w0.15: v1(155.225,124.282) C11.2@155.225,125.09 ; R26.1@156.51,99.09 v1(157.429,99.09)
pads on no net: J2.31 J2.32 J2.33 J2.34 J4.5 J4.6 J6.3 J6.4 J7.3 J7.4 J11.51 J11.52 J15.61 J15.62 J16.21 J16.22 J17.9 J17.10 J18.5 J18.6 J19.19 J19.20 SW1.3 SW2.3 U3.9 U3.10 U36.34 U76.R8 U76.S14 X1.3 X3.5

## Polygon pours and split planes (outlines as drawn)
GND on IP1 (split plane): 224.273,173.125 224.842,172.972 225.385,172.747 225.895,172.453 226.362,172.095 226.778,171.678 227.136,171.212 227.431,170.702 227.656,170.158 227.808,169.59 227.885,169.006 227.885,168.712 227.885,8.712 227.885,8.418 227.808,7.834 227.656,7.266 227.431,6.722 227.136,6.212 226.778,5.745 226.362,5.329 225.895,4.971 225.385,4.677 224.842,4.451 224.273,4.299 223.69,4.222 223.396,4.222 223.395,4.222 63.395,4.222 63.101,4.222 62.518,4.299 61.949,4.451 61.406,4.677 60.896,4.971 60.429,5.329 60.013,5.745 59.655,6.212 59.36,6.722 59.135,7.266 58.983,7.834 58.906,8.418 58.906,8.712 58.906,114.963 58.959,115.042 58.981,115.083 59.006,115.13 59.035,115.226 59.071,115.405 59.08,115.505 59.071,115.605 59.035,115.784 59.022,115.826 59.006,115.88 58.959,115.968 58.906,116.047 58.906,168.712 58.906,169.006 58.983,169.59 59.135,170.158 59.36,170.702 59.655,171.211 60.013,171.678 60.429,172.095 60.896,172.453 61.406,172.747 61.949,172.972 62.518,173.125 63.101,173.201 223.395,173.201 223.396,173.201 223.69,173.201
PNET5 on IP2 (split plane): 224.273,173.125 224.842,172.972 225.385,172.747 225.895,172.453 226.362,172.095 226.778,171.678 227.136,171.212 227.431,170.702 227.656,170.158 227.808,169.59 227.885,169.006 227.885,168.712 227.885,8.712 227.885,8.418 227.808,7.834 227.656,7.266 227.431,6.722 227.136,6.212 226.778,5.745 226.362,5.329 225.895,4.971 225.385,4.677 224.842,4.451 224.273,4.299 223.69,4.222 223.396,4.222 223.395,4.222 63.395,4.222 63.101,4.222 62.518,4.299 61.949,4.451 61.406,4.677 60.896,4.971 60.429,5.329 60.013,5.745 59.655,6.212 59.36,6.722 59.135,7.266 58.983,7.834 58.906,8.418 58.906,8.712 58.906,114.963 58.959,115.042 58.981,115.083 59.006,115.13 59.035,115.226 59.071,115.405 59.08,115.505 59.071,115.605 59.035,115.784 59.022,115.826 59.006,115.88 58.959,115.968 58.906,116.047 58.906,168.712 58.906,169.006 58.983,169.59 59.135,170.158 59.36,170.702 59.655,171.211 60.013,171.678 60.429,172.095 60.896,172.453 61.406,172.747 61.949,172.972 62.518,173.125 63.101,173.201 223.395,173.201 223.396,173.201 223.69,173.201
PNET7 on IP3 (split plane): 224.273,173.125 224.842,172.972 225.385,172.747 225.895,172.453 226.362,172.095 226.778,171.678 227.136,171.212 227.431,170.702 227.656,170.158 227.808,169.59 227.885,169.006 227.885,168.712 227.885,8.712 227.885,8.418 227.808,7.834 227.656,7.266 227.431,6.722 227.136,6.212 226.778,5.745 226.362,5.329 225.895,4.971 225.385,4.677 224.842,4.451 224.273,4.299 223.69,4.222 223.396,4.222 223.395,4.222 63.395,4.222 63.101,4.222 62.518,4.299 61.949,4.451 61.406,4.677 60.896,4.971 60.429,5.329 60.013,5.745 59.655,6.212 59.36,6.722 59.135,7.266 58.983,7.834 58.906,8.418 58.906,8.712 58.906,114.963 58.959,115.042 58.981,115.083 59.006,115.13 59.035,115.226 59.071,115.405 59.08,115.505 59.071,115.605 59.035,115.784 59.022,115.826 59.006,115.88 58.959,115.968 58.906,116.047 58.906,168.712 58.906,169.006 58.983,169.59 59.135,170.158 59.36,170.702 59.655,171.211 60.013,171.678 60.429,172.095 60.896,172.453 61.406,172.747 61.949,172.972 62.518,173.125 63.101,173.201 223.395,173.201 223.396,173.201 223.69,173.201
PNET1 on IP4 (split plane): 224.273,173.125 224.842,172.972 225.385,172.747 225.895,172.453 226.362,172.095 226.778,171.678 227.136,171.212 227.431,170.702 227.656,170.158 227.808,169.59 227.885,169.006 227.885,168.712 227.885,8.712 227.885,8.418 227.808,7.834 227.656,7.266 227.431,6.722 227.136,6.212 226.778,5.745 226.362,5.329 225.895,4.971 225.385,4.677 224.842,4.451 224.273,4.299 223.69,4.222 223.396,4.222 223.395,4.222 63.395,4.222 63.101,4.222 62.518,4.299 61.949,4.451 61.406,4.677 60.896,4.971 60.429,5.329 60.013,5.745 59.655,6.212 59.36,6.722 59.135,7.266 58.983,7.834 58.906,8.418 58.906,8.712 58.906,114.963 58.959,115.042 58.981,115.083 59.006,115.13 59.035,115.226 59.071,115.405 59.08,115.505 59.071,115.605 59.035,115.784 59.022,115.826 59.006,115.88 58.959,115.968 58.906,116.047 58.906,168.712 58.906,169.006 58.983,169.59 59.135,170.158 59.36,170.702 59.655,171.211 60.013,171.678 60.429,172.095 60.896,172.453 61.406,172.747 61.949,172.972 62.518,173.125 63.101,173.201 223.395,173.201 223.396,173.201 223.69,173.201

## Keep-outs
Edge.Cuts:
  circle w0.254: c118.896,57.012 r3
  circle w0.254: c223.495,10.062 r2.032
  circle w0.254: c118.896,147.012 r3
  circle w0.254: c68.555,10.062 r2.032
  circle w0.254: c91.415,167.542 r2.032
  circle w0.254: c223.495,167.542 r2.032
  circle w0.254: c172.895,57.012 r3
  circle w0.254: c172.895,147.012 r3
  circle w0: c172.895,147.012 r3
  lines w0: 58.395,8.712 ccw(c63.395,8.712) 63.395,3.712 223.395,3.712 ccw(c223.395,8.712) 228.395,8.712 228.395,168.712 ccw(c223.396,168.712) 223.395,173.712 63.396,173.712 ccw(c63.395,168.712) 58.395,168.712 58.396,8.712
  lines w0.254: 58.395,8.712 ccw(c63.395,8.712) 63.395,3.712 223.395,3.712 ccw(c223.395,8.712) 228.395,8.712 228.395,168.712 ccw(c223.396,168.712) 223.395,173.712 63.396,173.712 ccw(c63.395,168.712) 58.395,168.712 58.396,8.712

## Silkscreen, mask and mechanical layers (free items; w line width, h text height)
F.SilkS:
  text "PC110 MINI-ITX" at 172.102,4.353 h1